# Altium PCB LED_Driver.PcbDoc
Units mil, origin at the board's own origin, x right, y up, seen from the top; angles counter-clockwise.
Board outline 860.03 x 615.03 mil, 2 copper layers (Top Layer, Bottom Layer); 10 components, 10 nets, 25 pads, 2 vias.
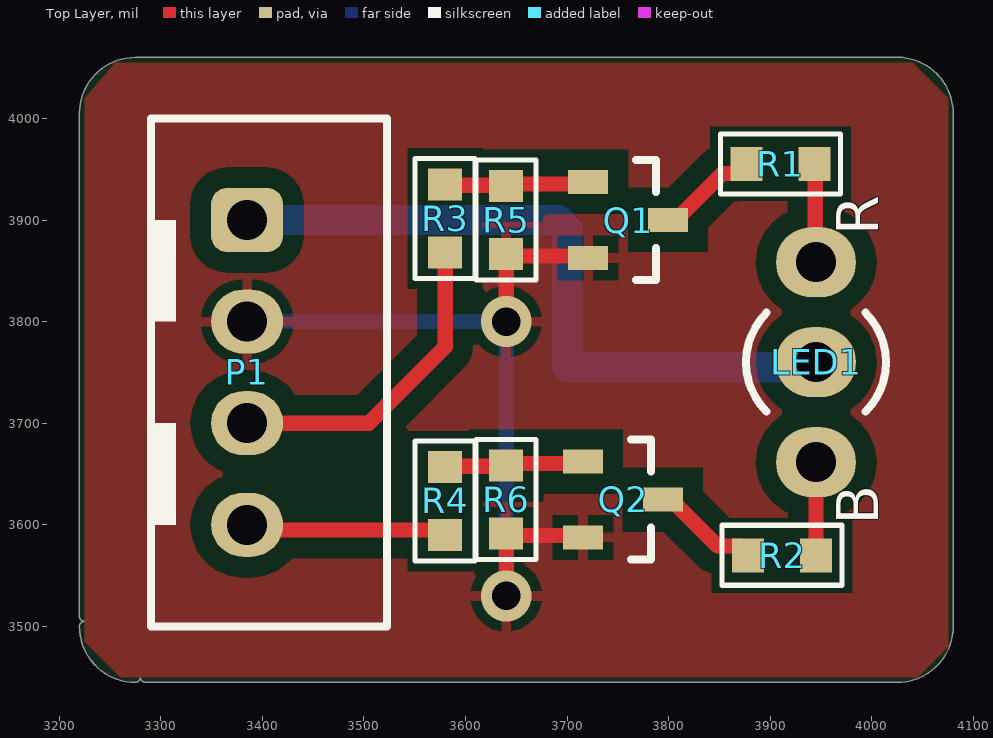
[diagram p0: Top Layer view]
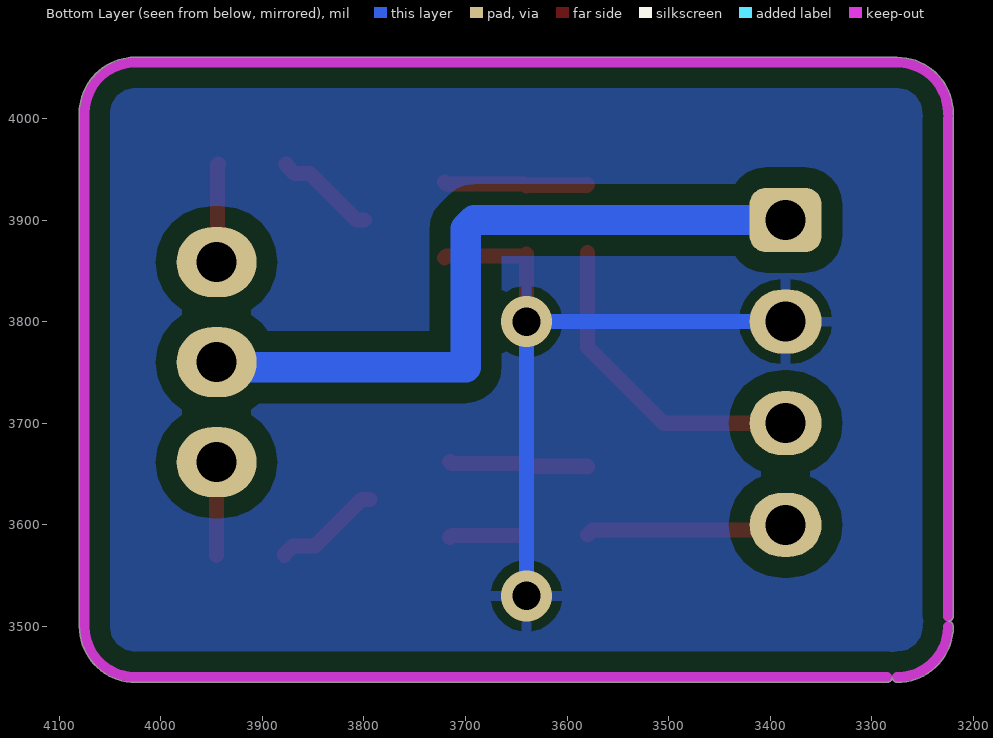
[diagram p1: Bottom Layer view, seen from below]
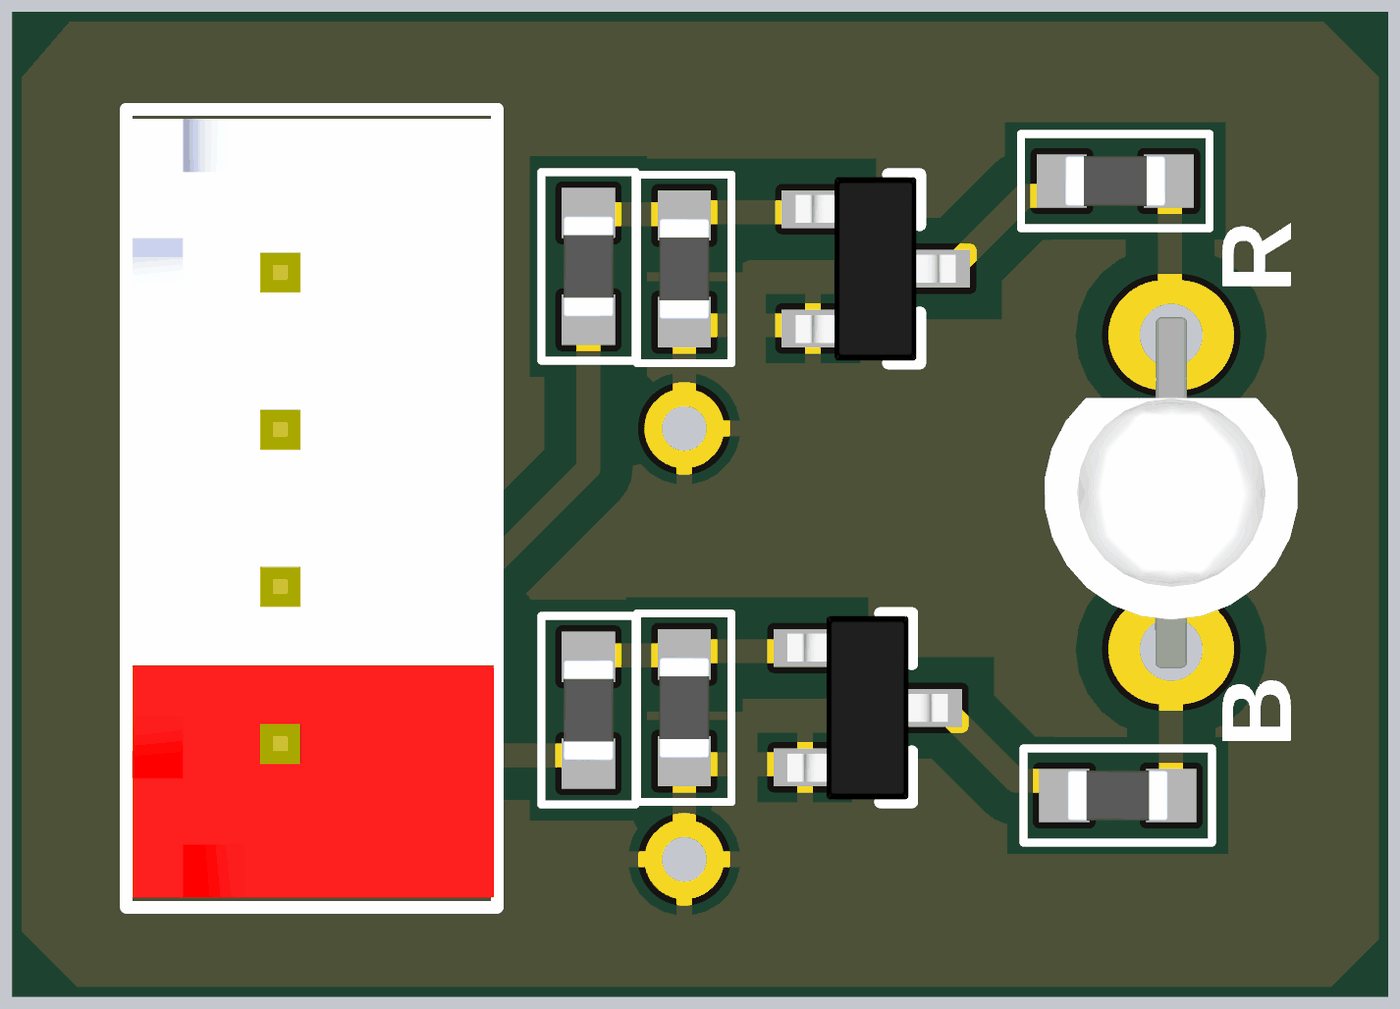
[diagram p2: 3D render of the assembled board from above, using the file's embedded part models]

## Layer stack, top to bottom
Top Solder: solder mask 0.4, Solder Resist, Dk 3.5
Top Layer: signal copper 1.4
Dielectric 1: dielectric 12.6, FR-4, Dk 4.8
Bottom Layer: signal copper 1.4
Bottom Solder: solder mask 0.4, Solder Resist, Dk 3.5

## Board outline
3224.61,3505 cw(c3225,3510) 3219.99,3510 3219.99,4005 cw(c3275,4005) 3275,4060.01 4030,4060.01 4032.1,4059.56 cw(c4025,4005) 4079.56,4012.1 4080.01,4010 4080.01,3500 cw(c4025,3500) 4025,3444.99 3285,3444.99 cw(c3285,3450) 3280,3449.61 cw(c3275,3450) 3275,3444.99 cw(c3275,3500) 3219.99,3500 cw(c3225,3500)

## Design rules (kind name [scope] priority, off if disabled: settings)
Clearance [All] p1: gap=20 ignorepadtopadclearanceinfootprint=FALSE
PolygonConnect [All] p1: connectstyle=Relief reliefconductorwidth=10 reliefentries=4 polygonreliefangle="90 Angle" airgapwidth=10
RoutingVias [All] p1: holewidth=28 width=50 viastyle="Through Hole" minholewidth=28 minwidth=50 maxholewidth=28 maxwidth=50
SolderMaskExpansion [All] p1: expansion=4 istentingtop=FALSE
Width [All] p1: maxlimit=100 minlimit=10 preferedwidth=20
30 further rules are at their usual default settings.

## Components (designator, comment, footprint, x,y, rotation, side; value= is the part's Value field where it differs from the comment)
LED1 "RB LED" LED-BICOLOR-3MM 3945,3858.43 r0 top
P1 "Header 4" HDR/Header/4/BOX/RED 3385,3750 r270 top
Q1 "C1815" SOT-23 3760,3900 r0 top
Q2 "C1815" SOT-23 3755,3625 r0 top
R1 "1K" "R 0603" 3910,3955 r0 top
R2 "330" "R 0603" 3911.54,3570 r0 top
R3 "4.7K" "R 0603" 3580,3901.54 r270 top
R4 "4.7K" "R 0603" 3580,3623.46 r90 top
R5 "47K" "R 0603" 3640,3900 r270 top
R6 "47K" "R 0603" 3640,3625 r270 top

## Footprints (in the part's own frame and the unit in brackets; to place one, negate y for a bottom-side part, rotate by r counter-clockwise, add the part's x,y. Pads: shape width x height; smd on the part's side, far side on the other; paste and mask are expansions set on the pad)
HDR/Header/4/BOX/RED [mm]
  rrect50% 1.6x1.8 hole 1: 1(-3.81,0)
  oval 1.6x1.8 hole 1: 2(-1.27,0) 3(1.27,0) 4(3.81,0)
  silkscreen extent -6.35,-2.41 6.35,3.5, body extent -6.2,-2.3 6.2,3.45, height 7
LED-BICOLOR-3MM [mm] "Diode, Axial; Body 5.2 x 2.7 mm (LxDia. max), Lead Dia. 0.86 mm (max)"
  oval 2x1.75 hole 1: 1(0,0) 2(0,-2.5) 3(0,-5)
  silkscreen extent -1.75,-3.74 1.75,-1.26, body extent -2.02,-5.29 2.02,0.29, height 6.76
"R 0603" [mm] "Chip Resistor, 2-Leads, Body 1.6x0.8mm, IPC Medium Density"
  rect 0.8x0.85 smd: 1(-0.85,0) 2(0.85,0)
  silkscreen extent -1.5,-0.75 1.5,0.75, body extent -0.8,-0.4 0.8,0.4, height 0.5
SOT-23 [mm] "SOT23, 3-Leads, Body 3.0x2.5mm (max), Pitch 0.95mm, IPC Medium Density"
  rect 1x0.6 smd: 1(-1,0.95) 2(-1,-0.95) 3(1,0)
  silkscreen extent 0.2,-1.5 0.7,1.5, body extent -1.28,-1.46 1.27,1.46, height 0.95

## Part data
LED1: library part "LED 2-color-A", "Bicolor RB 3mm LED"
P1: "Header, 4-Pin"
Q1 Q2: library part "Transistor NPN", "NPN Bipolar Transistor"
R1 R2 R3 R4 R5 R6: library part Resistor, "Resistor"

## Via types
v1: diameter 50, hole 28, Top Layer to Bottom Layer, 2 vias

## Nets (pads, with @x,y where several pads share a name; then routed paths per layer and width w, separated by ;. In a path a pad name is that pad's centre, name@x,y a point inside that pad or via, vN(x,y) a via of type N, cw(c..) or ccw(c..) an arc to the next point about the centre after c; other vN are vias at no path point)
GND: P1.2 Q1.2 Q2.2 R5.2 R6.2 | length 812.6
  Top Layer w15: v1(3640,3530) R6.2 3641.97,3589.57 3713.66,3589.57 Q2.2 ; v1(3640,3800) R5.2 3641.97,3864.57 3718.66,3864.57 Q1.2
  Bottom Layer w15: P1.2 v1(3640,3800) v1(3640,3530)
LED1: P1.3 R3.2 | length 319.1
  Top Layer w15: P1.3 3505,3700 3580,3775 R3.2
LED2: P1.4 R4.1 | length 199.1
  Top Layer w15: P1.4 3390,3595 3575,3595 R4.1
NetLED1_1: LED1.1 R1.2 | length 97.2
  Top Layer w15: R1.2 3944.23,3954.23 3944.23,3859.19 LED1.1
NetLED1_3: LED1.3 R2.2 | length 91.6
  Top Layer w15: R2.2 LED1.3
NetQ1_1: Q1.1 R3.1 R5.1 | length 142.9
  Top Layer w15: R3.1 3580.77,3934.23 3639.23,3934.23 R5.1 3641.97,3935.43 3718.66,3935.43 Q1.1
NetQ1_3: Q1.3 R1.1 | length 100.5
  Top Layer w15: Q1.3 3807.24,3900 3853.01,3945.77 3868.29,3945.77 3876.54,3954.02 R1.1
NetQ2_1: Q2.1 R4.2 R6.1 | length 137.9
  Top Layer w15: R4.2 3580.77,3657.7 3639.23,3657.7 R6.1 3641.97,3660.43 3713.66,3660.43 Q2.1
NetQ2_3: Q2.3 R2.1 | length 107.1
  Top Layer w15: Q2.3 3802.24,3625 3848.01,3579.23 3869.82,3579.23 3878.07,3570.98 R2.1
VCC: LED1.2 P1.1 | length 701.9
  Bottom Layer w30: P1.1 3691.21,3900 3700,3891.21 3700,3755 3940,3755 LED1.2

## Polygon pours and split planes (outlines as drawn)
GND on Bottom Layer "GND_L02_P000" (solid, remove dead copper, pour order 0): 3255,4055 3260,4050 4050,4050 4075,4025 4075,3475 4050,3450 3255,3450 3225,3480 3225,4025
GND on Top Layer "GND_L01_P002" (solid, remove dead copper, pour order 2): 3255,4055 4040,4055 4075,4020 4075,3480 4045,3450 3260,3450 3225,3485 3225,4020

## Keep-outs
Bottom Layer:
  lines w10: 3225,3500 ccw(c3275,3500) 3275,3450 ; 3225,3510 3225,4000 ; 3225,4005 cw(c3275,4005) 3275,4055 4030,4055 ; 3285,3450 4025,3450 ccw(c4025,3500) 4075,3500 4075,4010 ; 4025,4055 cw(c4025,4005) 4075,4005

## Text inside footprints (layer, text, board x,y; h text height)
LED1: Top Overlay "B" at 4020,3600 h70.87 r90; Top Overlay "R" at 4020,3885 h70.87 r90